# Altium PCB 板3.PcbDoc (part 2 of 3)
Units mm, origin at the board's own origin, x right, y up, seen from the top; angles counter-clockwise.
Board outline 152.4 x 101.6 mm, 4 copper layers (Top Layer, VCC, GND, Bottom Layer); 152 components, 486 nets, 1233 pads, 480 vias.
Unrouted connection lines stored in the file: 1.
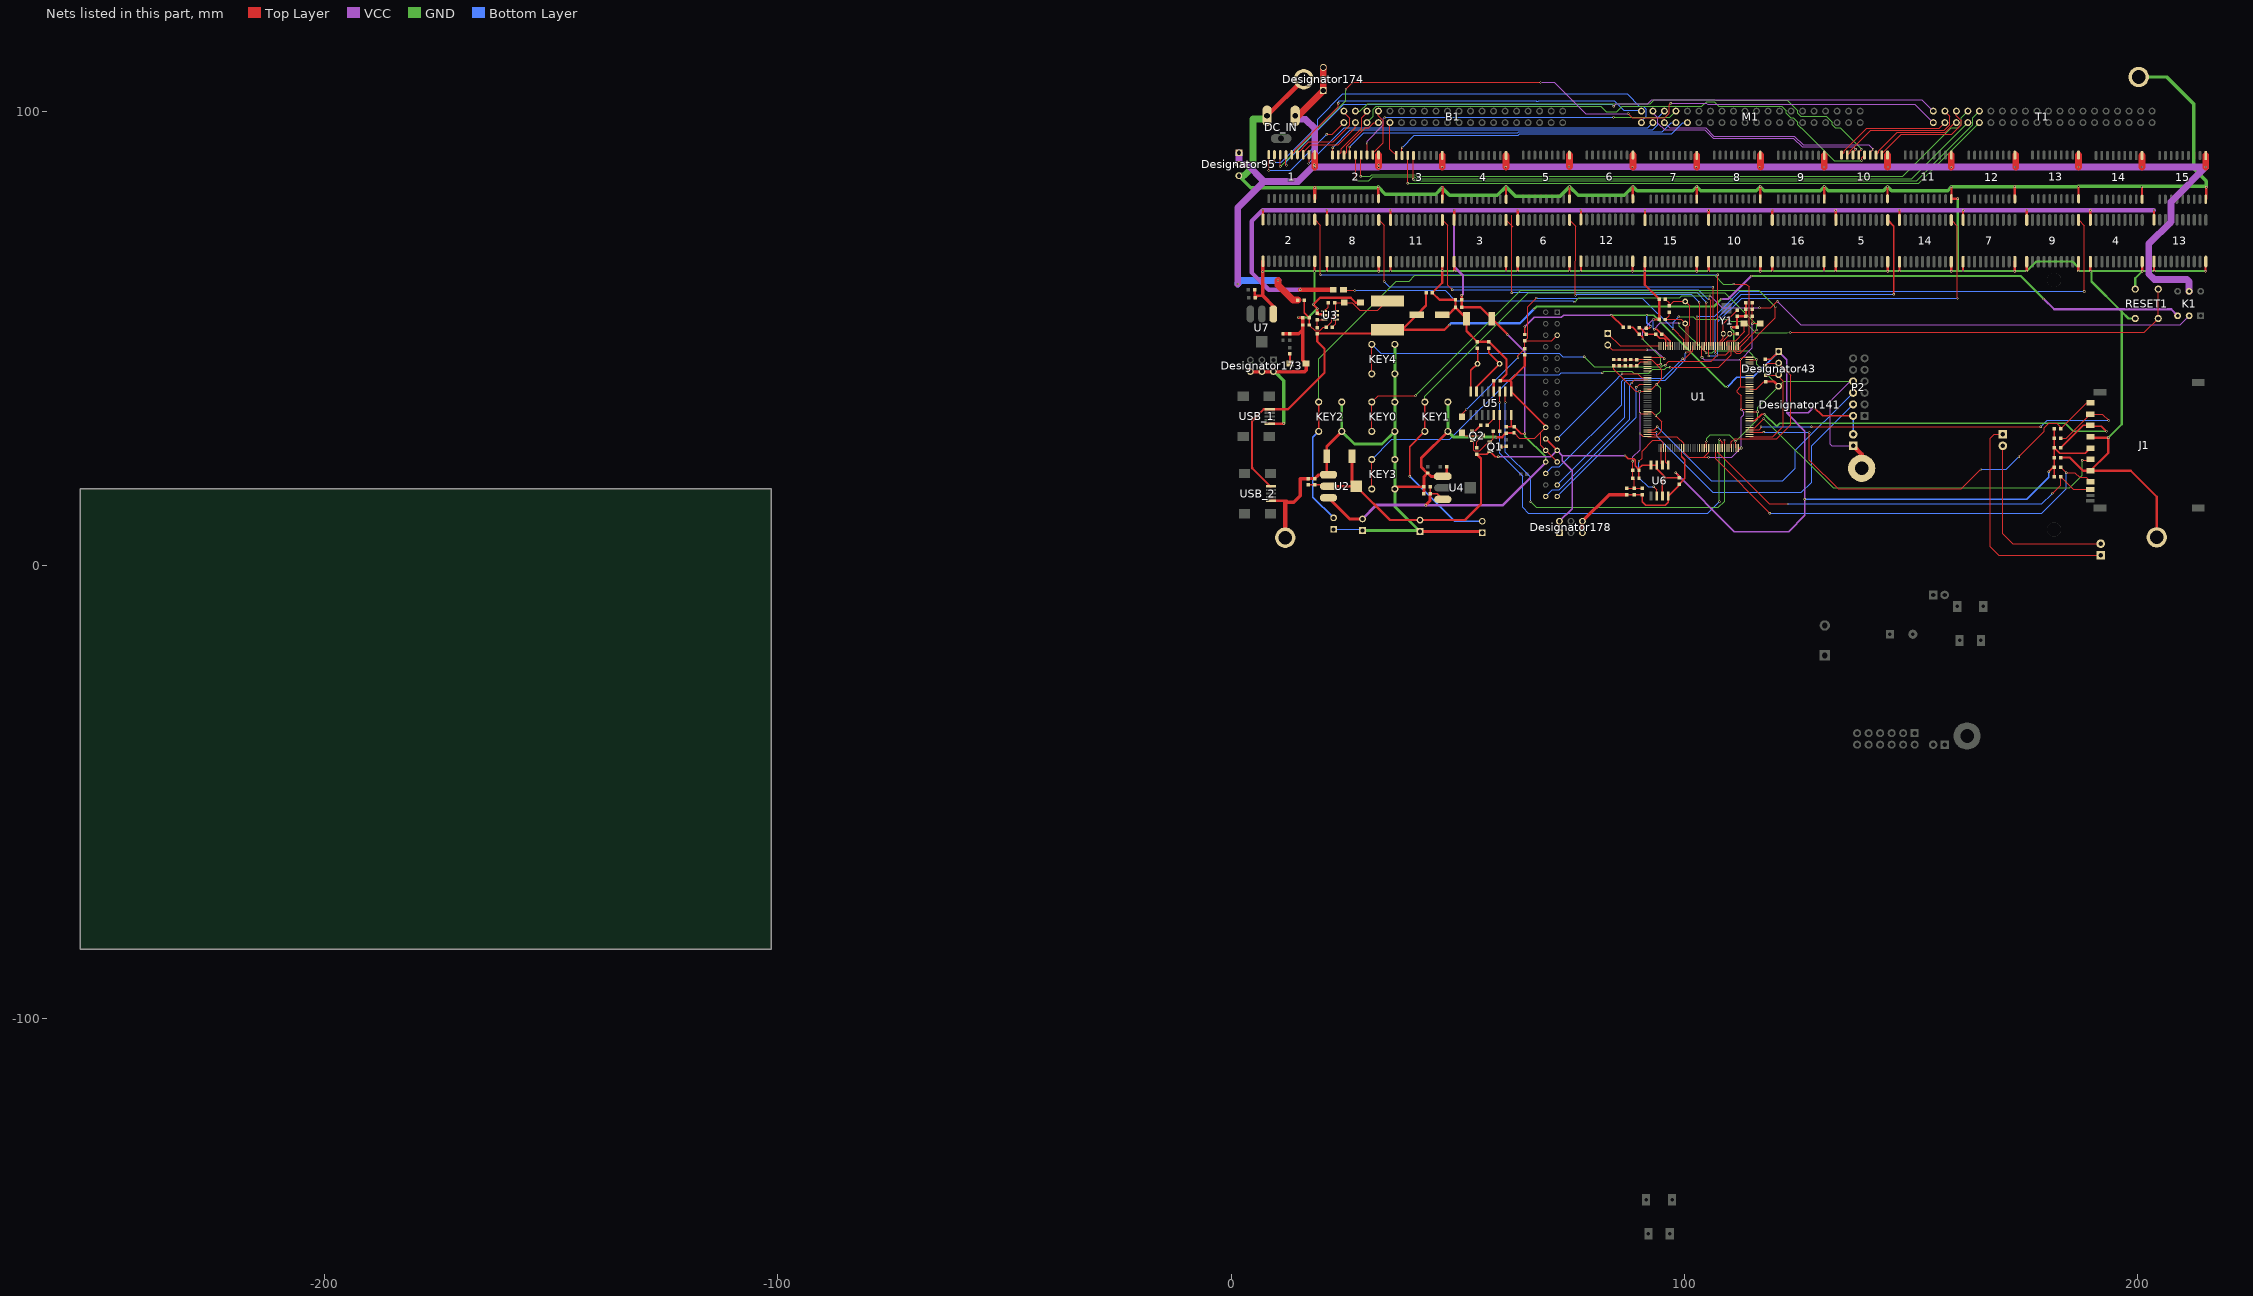
[diagram p4: the nets of this part, all layers, seen from the top]

## Via types
v1: diameter 0.5, hole 0.3, Top Layer to Bottom Layer, 465 vias
v2: diameter 3, hole 3, Top Layer to Bottom Layer, tented both sides, 6 vias
v3: diameter 1.27, hole 1.016, Top Layer to Bottom Layer, 4 vias
v4: diameter 1, hole 1, Top Layer to Bottom Layer, 4 vias
v5: diameter 0.8, hole 0.5, Top Layer to Bottom Layer, 1 vias

## Nets (pads, with @x,y where several pads share a name; then routed paths per layer and width w, separated by ;. In a path a pad name is that pad's centre, name@x,y a point inside that pad or via, vN(x,y) a via of type N, cw(c..) or ccw(c..) an arc to the next point about the centre after c; other vN are vias at no path point) (continued)
GND: 1.9 2.1@7.01,67.003 2.9@32.512,80.797 2.10@18.44,67.003 3.1@49.174,66.901 3.9@46.558,80.696 3.10@60.604,66.901 4.1@189.491,66.901 4.9@60.63,80.67 4.10@200.921,66.901 5.1@133.364,66.901 5.9@74.6,80.747 5.10@144.794,66.901 6.1@63.206,66.901 6.9@88.595,80.772 6.10@74.636,66.901 7.1@161.427,66.901 7.9@102.692,80.696 7.10@172.857,66.901 8.1@21.11,66.901 8.9@116.713,80.747 8.10@32.54,66.901 9.1@175.459,66.901 9.9@130.81,80.721 9.10@186.889,66.901 10.1@105.301,66.901 10.9@144.755,80.772 10.10@116.731,66.901 11.1@35.142,66.901 11.9@158.826,80.772 11.10@46.572,66.901 12.1@77.14,67.003 12.9@172.847,80.747 12.10@88.57,67.003 13.1@203.53,66.926 13.9@186.893,80.772 13.10@214.96,66.926 14.1@147.396,66.901 14.9@200.889,80.67 14.10@158.826,66.901 15.1@91.269,66.901 15.9@214.935,80.67 15.10@102.699,66.901 16.1 16.10 C2.1 C3.1 C4.1 C6.1 C7.1 C8.1 C9.1 C10.1 C11.2 C12.2 C13.2 C14.2 C15.2 C16.2 C17.2 C18.2 C19.2 C20.2 C21.2 C26.1 C27.1 C28.2 C29.1 C30.1 C31.1 C32.2 C34.1 C35.1 C36.1 C37.1 C38.1 C39.1 C40.1 C41.2 C42.1 C43.2 C44.1 C45.1 C47.2 C48.2 C49.2 C50.2 D3.1 D4.2 D5.1 D6.1 DC_IN.2 Designator43.4 Designator95.3 Designator137.1 Designator138.1 Designator141.22 Designator141.26 Designator141.27 Designator173.2 Designator173.4 Designator173.6 Designator178.5 Designator178.6 Designator179.1 Designator180.1 J1.3 J1.6 KEY0.1 KEY1.1 KEY2.1 KEY3.1 KEY4.1 P2.10 P3_1.1 pad.0@139.065,21.336 pad.1 pad.69 pad.72 R12.1 R14.2 RESET1.2 U1.16 U1.30 U1.31 U1.38 U1.51 U1.61 U1.71 U1.83 U1.94 U1.107 U1.120 U1.130 U1.143 U2.1 U3.2 U4.1 U5.1 U6.4 U7.1 USB_1.5 USB_2.5 | length 1313.4
  Top Layer w0.2: C43.2@62.381,29.121 63.562,27.94 66.946,27.94 Designator141.22@69.361,30.355 ; Designator141.22@69.367,30.353 68.28,29.266 68.28,26.36 69.363,25.277 Designator141.27@71.907,22.733 ; C18.2@84.33,45.326 84.355,45.301 C21.2@86.895,45.301 C20.2@89.41,45.301 ; C20.2@89.41,45.352 U1.38@91.783,45.352 ; U1.71@91.823,28.812 93.22,28.812 93.27,28.762 94.106,28.762 94.936,29.592 94.936,31.649 92.774,33.812 U1.61@91.823,33.812 ; U1.51@91.823,38.812 92.774,38.812 v1(93.844,39.882) 94.996,41.033 94.996,43.09 92.772,45.313 U1.38@91.823,45.313 ; 93.844,44.242 v1@94.686,44.242 ; U1.31@96.823,48.312 U1.30@97.323,48.312
  Top Layer w0.254: U1.83@99.323,25.812 99.323,23.917 99.346,23.894 ; U1.16@104.323,48.312 104.323,47.214 v1(104.724,46.812) ; U1.94@104.823,25.812 v1(104.823,27.229) ; v1(111.252,27.305) 111.323,27.234 U1.107@111.323,25.812 ; U1.120@114.323,33.812 pad.69@116.074,33.812 ; U1.130@114.323,38.812 115.774,38.812 117.424,40.462 R12.1@117.856,40.462 ; U1.143@114.323,45.312 v1@115.924,45.312
  Top Layer w0.3: C16.2@87.247,15.532 C15.2@88.898,15.532 C17.2@90.676,15.532 90.676,13.972 91.44,13.208 95.758,13.208 96.395,13.845 U6.4@96.395,15.189 98.804,17.599 C41.2@98.804,17.843 100.076,19.115 100.076,23.164 99.346,23.894 ; C44.1@87.808,52.4 88.544,52.4 C10.1@90.043,50.902 90.729,50.216 v1(90.729,49.835) ; v1(93.294,52.019) 93.853,52.019 C9.1@94.996,50.876 95.322,50.876 96.8,49.398 U1.31@96.8,48.335
  Top Layer w0.5: USB_1.5@8.528,31.166 11.524,31.166 v1(11.6,31.242) ; USB_2.5@8.782,14.148 12.268,14.148 ; v1@14.859,54.508 C31.1@15.799,54.508 ; v1(18.364,64.821) 2.10@18.364,66.926 ; v1(18.999,56.591) v1(18.11,57.48) 19.591,58.961 26.352,58.961 27.452,57.861 D3.1@28.499,57.861 ; v1@19.001,56.59 R14.2@19.001,55.512 19.184,55.328 20.328,55.328 U3.2@20.574,55.082 ; v1@21.11,64.849 8.1@21.11,66.901 ; v1(32.41,83.388) 32.41,81.001 2.9@32.563,80.848 ; v1(32.563,64.77) 8.10@32.563,66.878 ; v1@35.142,64.835 11.1@35.142,66.901 ; v1(46.507,83.185) 46.66,83.287 3.9@46.66,80.594 ; 11.10@46.558,66.887 v1(46.558,64.872) 46.558,62.255 C29.1@44.374,60.071 45.949,58.496 C2.1@49.479,58.496 C27.1@49.479,56.845 C27.1@49.479,56.769 ; C28.2@46.564,55.194 47.904,55.194 C27.1@49.479,56.769 ; U4.1@46.684,19.558 47.523,20.398 C35.1@47.523,21.667 ; v1(49.174,64.821) 3.1@49.174,66.901 ; v1(60.604,64.821) 3.10@60.604,66.901 ; 4.9@60.604,80.696 v1(60.604,83.464) ; C32.2@60.679,29.096 62.355,29.096 C43.2@62.381,29.121 ; v1(63.195,64.821) 63.206,64.831 6.1@63.206,66.901 ; C6.1@64.77,46.33 64.77,43.967 61.468,40.665 ; Designator141.26@69.03,25.277 Designator141.26@69.363,25.277 ; Designator141.22@69.367,30.353 69.367,30.616 U5.1@61.747,38.236 61.747,40.386 61.468,40.665 ; 5.9@74.6,80.747 v1@74.6,83.439 ; v1(74.625,64.821) 6.10@74.625,66.89 ; v1@77.14,64.846 12.1@77.14,67.003 ; v1(88.494,64.795) 12.10@88.494,66.926 ; 6.9@88.595,80.772 v1@88.595,83.439 ; 15.1@91.237,66.548 91.237,61.805 C8.1@94.393,58.649 C7.1@94.393,54.16 ; pad.72@93.142,54.153 C7.1@94.386,54.153 ; v1(102.692,64.795) 15.10@102.692,66.894 ; 7.9@102.692,80.696 v1(102.692,83.439) ; v1@105.301,64.838 10.1@105.301,66.901 ; v1(110.312,52.426) C3.1@111.582,52.426 C4.1@111.582,54.839 113.524,54.839 C14.2@113.524,57.836 ; 8.9@116.662,81.102 v1(116.662,83.439) ; v1(116.713,64.795) 10.10@116.713,66.883 ; R12.1@117.856,40.462 119.736,40.462 Designator43.4@120.752,39.446 ; v1@119.332,64.849 16.1@119.332,66.901 ; v1(130.734,64.821) 16.10@130.734,66.872 ; 9.9@130.81,80.721 v1(130.81,83.49) ; v1@133.364,64.86 5.1@133.364,66.901 ; 10.9@144.755,80.772 v1(144.755,83.439) ; v1(144.831,64.77) 5.10@144.831,66.864 ; v1@147.396,64.846 14.1@147.396,66.901 ; v1(158.801,64.795) 14.10@158.801,66.876 ; 11.9@158.826,80.772 v1@160.223,80.772 ; 11.9@158.852,80.797 v1(158.852,83.388) ; v1@161.427,64.857 7.1@161.427,66.901 ; v1(172.822,64.77) 7.10@172.822,66.865 ; 12.9@172.822,80.772 v1(172.822,83.439) ; v1@175.459,64.842 9.1@175.459,66.901 ; C42.1@182.931,23.693 184.944,23.693 187.846,20.791 J1.6@189.493,20.791 ; v1(186.842,64.821) 9.10@186.842,66.854 ; 13.9@186.868,80.797 v1(186.868,83.49) ; v1@189.491,64.827 4.1@189.491,66.901 ; J1.3@189.493,28.291 189.743,28.042 v1(193.421,28.042) 193.421,24.719 J1.6@189.493,20.791 ; 14.9@200.863,80.696 v1(200.863,83.388) ; v1(200.914,64.77) 4.10@200.914,66.894 ; 13.1@203.53,66.926 203.53,64.846 v1(203.556,64.821) ; pad.1@204.132,6.096 204.132,15.07 198.411,20.791 J1.6@189.493,20.791 ; v1(214.909,64.77) 13.10@214.909,66.876 ; 15.9@215.036,80.772 v1(215.036,83.337) ; C27.1@49.479,56.769 D5.1@51.892,54.356 51.892,51.613 C39.1@54.28,49.225 C38.1@56.845,49.225 56.858,49.225 60.706,45.377 60.706,42.062 C37.1@59.309,40.665 61.468,40.665
  Top Layer w0.508: v1(58.42,28.194) 59.777,28.194 ; 59.69,28.194 C32.2@60.592,29.096
  Top Layer w0.635: C49.2@5.187,60.704 5.187,59.01 C48.2@5.271,58.926 5.733,59.389 7.01,59.389 ; C45.1@17.043,19.051 C26.1@18.44,19.051 19.303,19.914 U2.1@21.461,19.914 21.082,20.293 D6.1@21.082,23.953 21.082,26.162 KEY2.1@24.384,29.464 ; KEY3.1@36.093,16.764 36.601,17.272 C40.1@42.494,17.272 ; Designator137.1@41.656,7.366 55.118,7.366 Designator180.1@55.372,7.112 ; C34.1@42.494,15.748 C40.1@42.494,17.272 ; U4.1@46.684,19.558 44.07,19.558 C36.1@43.332,20.295 ; KEY1.1@47.803,29.464 41.91,23.571 41.91,21.61 43.224,20.295 C36.1@43.332,20.295 ; C40.1@42.494,17.272 42.494,19.457 C36.1@43.332,20.295
  Top Layer w0.75: 11.934,13.814 13.814,13.814 15.24,15.24 15.24,19.05 ; 15.241,19.051 C45.1@17.043,19.051
  Top Layer w0.762: Designator173.6@4.234,42.672 Designator173.4@6.774,42.672 Designator173.2@9.314,42.672 16.256,42.672 16.51,42.926 D4.2@16.51,44.45 15.799,45.161 15.799,51.867 ; v1(6.934,64.694) 6.934,66.926 2.1@7.01,67.003 ; v1@7.01,64.618 7.01,59.389 9.313,57.086 U7.1@9.313,55.374 ; C50.2@11.432,50.99 C47.2@12.956,50.99 14.922,50.99 15.799,51.867 ; C31.1@15.799,54.508 C30.1@15.799,52.934 15.799,51.867 ; 1.9@18.44,80.823 v1@18.44,83.16 ; Designator178.5@77.47,7.112 Designator178.6@77.47,9.652 83.35,15.532 C16.2@87.247,15.532
  Top Layer w1: DC_IN.2@7.917,99.06 15.984,107.127 pad.1@15.998,107.127 ; pad.1@11.934,6.035 11.934,13.814 ; P3_1.1@137.16,26.289 139.065,24.384 pad.0@139.065,21.336
  VCC w0.254: v1(90.729,49.835) 90.729,51.74 pad.72@93.142,54.153 ; v1(93.294,52.019) 94.666,53.391 v1(98.831,53.391) ; P3_1.1@137.16,26.289 132.461,26.289 132.08,26.67 132.08,36.068 136.525,40.513 P2.10@137.16,40.513
  GND w0.254: v1@90.716,49.847 v1@90.729,49.86 ; v1(90.729,49.835) 94.717,45.847 v1(94.717,44.272) ; v1(93.675,32.893) 94.735,33.953 94.735,38.991 v1(93.844,39.882) ; v1(98.831,53.391) 98.831,52.705 v1(104.724,46.812) 106.143,46.812 106.568,47.237 110.82,47.237 114.002,47.237 v1(115.926,45.314) 115.926,44.272 Designator43.4@120.752,39.446 ; v1@104.696,27.229 104.902,27.435 104.902,27.94 105.664,28.702 109.855,28.702 v1(111.252,27.305) 116.103,32.156 pad.69@116.103,33.782 116.103,34.798 Designator43.4@120.752,39.446 ; P2.10@137.16,40.513 121.818,40.513 Designator43.4@120.752,39.446
  GND w0.3: v1(110.312,52.426) 110.312,52.014 110.815,51.511 110.815,47.242 110.82,47.237
  GND w0.5: v1@6.934,64.821 v1(18.364,64.821) ; v1(14.757,54.61) 17.018,54.61 v1(18.999,56.591) ; v1(18.11,57.48) 18.364,57.734 v1(18.364,64.821) ; KEY2.1@24.384,29.464 KEY2.1@24.384,35.964 ; v1@88.468,64.821 v1(77.114,64.821) v1(74.625,64.821) v1(63.195,64.821) v1(60.604,64.821) v1(49.174,64.821) v1(35.128,64.821) v1(21.082,64.821) v1(18.364,64.821) ; v1@88.494,64.821 v1(91.237,64.821) v1(105.283,64.821) v1(119.304,64.821) v1(130.734,64.821) v1(133.325,64.821) v1@144.78,64.821 ; v1@144.831,64.821 v1(147.371,64.821) v1(161.392,64.821) v1@172.771,64.821 ; 160.249,64.897 v1(160.249,80.797) ; v1@172.822,64.821 v1(175.438,64.821) 177.546,66.929 185.547,66.929 186.842,65.634 v1(186.842,64.821) v1(189.484,64.821) ; v1(193.421,28.042) 196.444,31.064 196.444,55.829 ; RESET1.2@199.39,54.356 197.917,54.356 196.444,55.829 ; RESET1.2@199.39,60.856 199.39,63.246 v1(200.914,64.77) ; v1@200.863,64.821 v1(189.484,64.821) ; v1@200.914,64.821 v1(203.556,64.821) v1@214.935,64.821 ; v1(189.484,64.821) 189.763,64.541 189.763,62.509 196.444,55.829
  GND w0.635: KEY2.1@24.384,29.464 27.178,26.67 33.299,26.67 KEY0.1@36.093,29.464 ; Designator138.1@28.956,7.62 Designator137.1@41.402,7.62 ; KEY4.1@36.093,48.664 KEY4.1@36.093,42.164 KEY0.1@36.093,35.964 KEY0.1@36.093,29.464 ; Designator137.1@41.656,7.366 Designator137.1@41.402,7.62 ; KEY1.1@47.803,35.964 KEY1.1@47.803,29.464 49.073,28.194 v1(58.42,28.194) ; KEY0.1@36.093,29.464 KEY3.1@36.093,23.264 KEY3.1@36.093,16.764 36.093,12.929 Designator137.1@41.402,7.62
  GND w0.762: Designator95.3@1.694,85.852 4.361,83.185 v1(18.415,83.185) 32.207,83.185 v1(32.41,83.388) 34.011,81.788 45.11,81.788 v1(46.507,83.185) 48.158,81.534 58.696,81.534 60.604,83.442 62.767,81.28 72.463,81.28 74.625,83.442 76.533,81.534 86.712,81.534 88.621,83.442 89.513,82.55 101.803,82.55 v1(102.692,83.439) 103.581,82.55 115.773,82.55 v1(116.662,83.439) 117.551,82.55 129.918,82.55 130.81,83.442 131.702,82.55 143.866,82.55 v1(144.755,83.439) 145.644,82.55 158.013,82.55 v1(158.852,83.388) 158.902,83.439 v1(172.822,83.439) 186.817,83.439 v1(186.868,83.49) 214.884,83.49 v1(215.036,83.337) 215.036,84.684 212.344,87.376 212.344,101.6 206.309,107.635 pad.1@200.148,107.635 ; v1@6.934,64.676 v1(6.934,64.694) ; DC_IN.2@7.219,98.362 DC_IN.2@7.917,99.06 ; Designator173.2@9.314,42.672 9.568,42.672 11.6,40.64 v1(11.6,31.242)
  GND w1.5: Designator95.3@1.694,85.852 2.794,85.852 4.806,87.864 4.806,98.362 DC_IN.2@7.219,98.362
  Bottom Layer w0.2: Designator179.1@22.606,7.874 28.702,7.874 Designator138.1@28.956,7.62
  Bottom Layer w0.254: pad.72@93.142,54.153 93.142,52.172 v1(93.294,52.019)
  other v1: 74.625,83.464 88.621,83.464
IOVDD: 
"IWIRE DQ": 
"JOY CLK": J1.5 U1.113 | length 86.9
  Top Layer w0.254: U1.113@114.323,30.312 115.478,30.312 v1@117.462,32.296 ; v1(187.706,23.114) 189.316,23.114 J1.5@189.493,23.291
  GND w0.254: v1(117.45,32.309) 132.74,17.018 184.912,17.018 187.706,19.812 v1(187.706,23.114)
"JOY DAT": J1.8 R28.1 U1.99 | length 92.6
  Top Layer w0.254: U1.99@107.323,25.812 107.323,24.822 118.683,13.462 v1(122.682,13.462) ; v1(181.102,15.748) 182.931,17.577 R28.1@182.931,19.456 185.725,16.662 J1.8@189.484,16.662
  Bottom Layer w0.254: v1(122.682,13.462) 178.816,13.462 v1(181.102,15.748)
"JOY LAT": J1.7 R27.1 U1.98 | length 98.4
  Top Layer w0.2: U1.98@106.823,25.812 106.823,23.384 v1(118.777,11.43) ; R27.1@182.931,21.575 v1(184.186,20.32) 186.098,20.32 187.114,19.304 188.555,19.304 J1.7@189.493,18.366
  Bottom Layer w0.2: v1(118.777,11.43) 178.816,11.43 184.186,16.8 v1(184.186,20.32)
JRDO: 
JTCK: Designator43.3 R12.2 U1.109 | length 23.2
  Top Layer w0.2: U1.109@114.323,28.312 119.498,28.312 121.802,30.616 121.802,40.496 120.752,41.546 Designator43.3@120.752,41.986 120.612,41.847 R12.2@117.858,41.847
JTDI: U1.110
JTMS: Designator43.2 R6.2 U1.105 | length 33.9
  Top Layer w0.2: U1.105@110.323,25.812 110.323,27.154 111.054,27.885 120.341,27.885 123.444,30.988 123.444,41.834 Designator43.2@120.752,44.526 118.324,44.526 R6.2@117.778,43.98
KEY0: KEY0.2 U1.3 | length 123.4
  Top Layer w0.2: 112.269,46.712 120.04,54.483 v1(120.04,56.921)
  Top Layer w0.254: KEY0.2@31.013,29.464 KEY0.2@31.013,35.964 32.387,37.338 v1(40.64,37.338) ; U1.3@110.823,48.312 110.823,47.256 111.395,46.685 112.251,46.685 112.274,46.707
  GND w0.254: v1(40.64,37.338) 63.881,60.579 116.383,60.579 v1(120.04,56.921)
KEY1: Designator180.2 KEY1.2 U1.2 | length 134.1
  Top Layer w0.2: U1.2@111.323,48.312 111.323,47.36 111.572,47.112 112.074,47.112 112.25,47.287 112.25,48.166 v1(115.926,51.841)
  Top Layer w0.3: v1(39.37,19.558) 39.37,26.111 KEY1.2@42.723,29.464 KEY1.2@42.723,35.964
  GND w0.254: KEY1.2@42.723,35.964 42.723,37.236 65.557,60.071 108.89,60.071 115.926,53.035 v1(115.926,51.841)
  Bottom Layer w0.3: v1(39.37,19.558) 49.276,9.652 Designator180.2@55.372,9.652
KEY2: Designator179.2 KEY2.2 U1.1 | length 155.1
  Top Layer w0.2: U1.1@111.823,48.312 111.823,48.602 114.229,51.008 114.229,61.392
  Top Layer w0.254: v1(110.842,61.976) 113.644,61.976 114.229,61.392
  Top Layer w0.3: KEY2.2@19.304,29.464 KEY2.2@19.304,35.964
  GND w0.254: KEY2.2@19.304,35.964 19.304,45.466 36.449,62.611 39.243,62.611 40.506,63.874 106.659,63.874 108.556,61.976 v1(110.842,61.976)
  Bottom Layer w0.3: KEY2.2@19.304,29.464 18.034,28.194 18.034,14.986 Designator179.2@22.606,10.414
KEY3: KEY3.2 U1.4 | length 97.7
  Top Layer w0.254: KEY3.2@31.013,16.764 KEY3.2@31.013,23.264 ; v1(96.799,43.637) 107.544,43.637 110.323,46.416 U1.4@110.323,48.312
  GND w0.254: v1(81.839,42.367) 82.213,42.741 88.32,42.741 88.788,42.273 92.13,42.273 93.03,43.173 95.627,43.173 96.091,43.637 v1(96.799,43.637)
  Bottom Layer w0.254: KEY3.2@31.013,23.264 35.435,27.686 48.254,27.686 62.506,41.939 72.369,41.939 72.798,42.367 v1(81.839,42.367)
KEY4: KEY4.2 U1.5 | length 90
  Top Layer w0.254: KEY4.2@31.013,42.164 KEY4.2@31.013,48.664 ; v1(95.707,44.069) 96.527,44.889 105.852,44.889 107.369,46.406 109.118,46.406 109.823,47.11 U1.5@109.823,48.312
  GND w0.254: v1(77.851,45.923) 80.079,43.695 94.956,43.695 95.329,44.069 v1(95.707,44.069)
  Bottom Layer w0.254: KEY4.2@31.013,48.664 32.97,46.707 72.369,46.707 73.153,45.923 v1(77.851,45.923)
l1: P4_1.1 P4_2.1 | length 52.2
  Top Layer w0.254: P4_1.1@170.18,28.829 168.275,28.829 167.386,27.94 167.386,4.064 169.291,2.159 P4_2.1@191.77,2.159
l2: P4_1.2 P4_2.2 | length 41.9
  Top Layer w0.254: P4_1.2@170.18,26.289 170.18,6.858 172.339,4.699 P4_2.2@191.77,4.699
"LCD BL": Designator141.23 U1.46 | length 26.2
  Top Layer w0.2: v1(86.208,42.164) 89.662,42.164 90.514,41.312 U1.46@91.823,41.312
  Bottom Layer w0.2: Designator141.23@71.907,27.813 85.42,41.326 85.42,41.377 v1(86.208,42.164)
LED0: U1.135
LED1: 
LRCK: 
MCLK: 
"MP3 LEFT": 
"MP3 RIGHT": 
NetANT1_1: 
NetBAT_1: 
NetBEEP1_2: 
NetBOOT1_3: 
NetBOOT1_4: 
NetC3_2: C3.2 U1.8 Y1.2 | length 5
  Top Layer w0.2: U1.8@108.323,48.312 108.323,49.263 109.957,50.897 Y1.2@109.957,51.029 C3.2@111.568,51.029
NetC4_2: C4.2 U1.9 Y1.1 | length 9.5
  Top Layer w0.2: U1.9@107.823,48.312 107.823,49.329 108.534,50.04 Y1.1@108.534,51.029 108.534,53.173 C4.2@111.584,56.223
NetC7_2: C7.2 R2.1 U1.24 Y2.1 | length 11.8
  Top Layer w0.2: R2.1@96.622,55.778 96.622,55.002 C7.2@95.771,54.151 99.265,54.151 Y2.1@100.152,53.264 100.323,53.093 U1.24@100.323,48.312
NetC8_2: C8.2 R2.2 U1.23 Y2.2 | length 16.1
  Top Layer w0.2: C8.2@95.777,58.647 96.623,57.801 R2.2@96.623,57.163 97.604,58.144 Y2.2@100.152,58.144 101.087,57.209 101.087,52.877 100.823,52.612 U1.23@100.823,48.312
NetC22_1: C22.1 U3.1 | length 2.2
  Top Layer w0.2: U3.1@20.574,56.032 21.412,56.871 C22.1@21.412,57.887
NetC22_2: C22.2 D3.2 L1.2 U3.6 | length 15.3
  Top Layer w0.2: U3.6@23.114,56.032 23.114,57.567 C22.2@22.796,57.885 26.651,57.885 28.402,56.134 32.36,56.134 L1.2@34.468,58.242
NetC30_2: C30.2 C31.2 R15.1 R23.1 U3.5 | length 14.3
  Top Layer w0.2: C30.2@17.183,52.932 17.245,52.932 18.496,51.681 19.506,51.681 20.276,52.451 R15.1@20.955,52.451 22.179,53.675 22.179,54.511 22.355,54.686 22.718,54.686 U3.5@23.114,55.082
  Top Layer w0.3: C30.2@17.183,52.932 C31.2@17.183,54.507
  Top Layer w0.305: R23.1@16.096,58.42 16.096,55.594 C31.2@17.183,54.507
NetC37_2: C37.2 U5.4 | length 2.4
  Top Layer w0.5: U5.4@57.937,38.236 C37.2@57.937,40.654
NetC38_2: C38.2 U5.7 Y3.1 | length 12.7
  Top Layer w0.3: U5.7@54.127,38.236 54.127,39.319 Y3.1@59.207,44.399 56.844,46.763 C38.2@56.844,47.841
NetC39_2: C39.2 U5.8 Y3.2 | length 10.3
  Top Layer w0.3: U5.8@52.857,38.236 52.857,42.929 Y3.2@54.327,44.399 C39.2@54.327,47.966
NetC46_1: 
NetC49_1: 
NetC49_2: 
NetC50_1: 
NetC50_2: 
NetC55_2: 
NetC57_1: 
NetC58_1: 
NetC66_2: 
NetC67_2: 
NetC68_2: 
NetC69_2: 
NetC70_1: 
NetC70_2: 
NetC74_2: 
NetC75_2: 
NetC76_2: 
NetC77_1: 
NetC77_2: 
NetC78_1: 
NetC78_2: 
NetC79_1: 
NetC80_1: 
NetC81_1: 
NetC82_1: 
NetC91_2: 
NetCAN1_1: 
NetCAN1_3: 
NetD1_2: D1.2 U1.6 | length 7.6
  Top Layer w0.2: U1.6@109.323,48.312 109.323,49.263 109.572,49.512 111.237,49.512 113.182,51.457 113.132,51.508 D1.2@113.132,53.289
NetD4_1: 1.10 2.10@32.512,90.449 3.10@46.558,90.348 4.10@60.63,90.322 5.10@74.6,90.399 6.10@88.595,90.424 7.10@102.692,90.348 8.10@116.713,90.399 9.10@130.81,90.373 10.10@144.755,90.424 11.10@158.826,90.424 12.10@172.847,90.399 13.10@186.893,90.424 14.10@200.889,90.322 15.10@214.935,90.322 DC_IN.1 Designator95.1 Designator95.2 Designator174.1 Designator174.2 Designator174.3 K1.5 R23.2 | length 366.1
  Top Layer w1.5: v1(10.33,62.738) 10.33,61.722 13.631,58.422 R23.2@14.712,58.422 ; DC_IN.1@14.117,99.06 14.732,99.06 Designator174.1@20.32,104.648 Designator174.2@20.32,107.188 Designator174.3@20.32,109.728 ; v1(18.44,87.757) 1.10@18.44,90.475 ; v1@32.512,87.884 2.10@32.512,90.449 ; v1@46.558,87.757 3.10@46.558,90.348 ; v1@60.63,87.757 4.10@60.63,90.322 ; v1@74.6,87.859 5.10@74.6,90.399 ; v1@88.595,87.757 6.10@88.595,90.424 ; v1@102.692,87.757 7.10@102.692,90.348 ; v1@116.713,87.757 8.10@116.713,90.399 ; v1@130.81,87.782 9.10@130.81,90.373 ; v1@144.755,87.782 10.10@144.755,90.424 ; v1@158.826,87.732 11.10@158.826,90.424 ; v1@173.025,87.782 12.10@173.025,90.399 ; v1@186.893,87.782 13.10@186.893,90.424 ; v1@200.889,87.782 14.10@200.889,90.322 ; v1(214.935,87.782) 15.10@214.935,90.322
  VCC w1.5: v1(1.44,61.976) 1.44,78.74 7.282,84.582 ; Designator95.1@1.694,90.932 Designator95.2@1.694,88.392 3.472,88.392 7.282,84.582 ; DC_IN.1@14.625,98.298 16.426,98.298 18.44,96.284 v1(18.44,87.757) ; v1@32.48,87.757 v1(18.44,87.757) ; v1@32.563,87.839 88.411,87.839 v1(88.494,87.757) 144.602,87.757 144.628,87.782 v1(144.856,87.782) v1(172.898,87.782) v1(186.868,87.782) v1(200.863,87.782) v1(214.935,87.782) 207.264,80.112 207.264,75.692 202.356,70.784 202.356,64.241 203.605,62.992 210.82,62.992 211.277,62.535 K1.5@211.277,60.366 ; 7.282,84.582 14.778,84.582 17.953,87.757 v1(18.44,87.757)
  Bottom Layer w1.5: v1(1.44,61.976) 2.202,62.738 v1(10.33,62.738)
  other v1: 32.563,87.681 158.852,87.732 46.533,87.757 60.579,87.757 102.591,87.757 116.548,87.757 130.759,87.782 74.498,87.859 18.313,88.265 32.512,88.29
NetD7_2: D7.2 Q2.3 R20.2 | length 8
  Top Layer w0.2: D7.2@50.927,29.159 51.562,28.524 Q2.3@55.455,28.524 54.129,27.198 R20.2@54.129,25.845
NetDS1_1: 
NetDS2_1: 
NetEJ_2: 
NetEJ_4: 
NetF1_2: F1.2 K1.2 | length 193.1
  Top Layer w0.2: F1.2@24.435,60.554 v1(27.229,60.554)
  Top Layer w0.254: v1(116.51,56.718) 119.024,56.718 119.463,57.157 119.463,57.16 119.801,57.498 119.805,57.498 v1(120.472,58.166)
  VCC w0.254: v1(105.613,59.411) 108.306,56.718 v1(116.51,56.718) ; v1(120.472,58.166) 125.628,53.01 209.321,53.01 K1.2@211.277,54.966
  GND w0.254: v1(75.743,57.988) 76.657,58.903 98.882,58.903 99.39,59.411 v1(105.613,59.411)
  Bottom Layer w0.2: v1(27.229,60.554) 47.177,60.554 49.404,58.327 75.378,58.327 v1@75.717,57.988 ; v1@75.73,57.975 v1@75.743,57.963
NetLED2: 
NetP5_5: 
NetP5_6: 
NetQ1_2: Q1.2 Q2.1 R18.2 | length 9.6
  Top Layer w0.2: Q2.1@53.105,27.574 53.448,27.231 53.448,25.339 53.624,25.164 54.81,25.164 56.682,27.036 Q1.2@57.016,27.036 57.823,27.843 R18.2@57.823,29.516
NetQ1_3: Q1.3 R17.1 | length 1.4
  Top Layer w0.2: Q1.3@59.366,26.086 60.554,26.086 R17.1@60.706,26.238
NetQ2_2: Q2.2 R19.2 | length 2.5
  Top Layer w0.3: Q2.2@53.105,29.474 53.768,29.474 R19.2@55.08,30.786
NetQ3_2: 
NetR1_2_1: 
NetR4_1: 
NetR4_1_1: 
NetR14_1: R14.1 R16.2 U3.3 | length 3.3
  Top Layer w0.2: R16.2@18.999,52.364 R14.1@18.999,54.127 U3.3@20.569,54.127
NetR15_2: R15.2 U3.4 | length 2
  Top Layer w0.2: R15.2@22.339,52.449 23.114,53.224 U3.4@23.114,54.132
NetR18_1: R18.1 U5.14 | length 3.5
  Top Layer w0.254: R18.1@59.207,29.515 U5.14@59.207,33.036
NetR19_1: R19.1 U5.13 | length 2.9
  Top Layer w0.2: R19.1@56.464,30.785 57.937,32.258 U5.13@57.937,33.036
NetR26_1: 
NetR30_1: 
NetR31_1: 
NetR37_1: 
NetR42_1: 
NetR47_2: 
NetR55_1: 
NetR58_1: 
NetU11_11: 
"NRF CE": U1.91
"NRF CS": U1.92
"NRF IRQ": U1.93
OUTL: 
OUTR: 
"OV SCL": U1.117
"OV SDA": 
"OV VSYNC": U1.100
PA0: U1.34
PA1: U1.35
PA2: Designator135.1 U1.36 | length 12.4
  Top Layer w0.254: Designator135.1@83.058,51.054 85.8,48.312 U1.36@94.323,48.312
PA3: Designator135.2 U1.37 | length 17.5
  Top Layer w0.254: Designator135.2@83.058,48.514 84.074,47.498 v1(91.694,47.498) ; U1.37@91.823,45.812 95.158,45.812 v1(95.504,45.466)
  VCC w0.254: v1(91.694,47.498) 93.472,47.498 v1(95.504,45.466)
PA4: U1.40
PA5: U1.41
PA6: U1.42
PA7: U1.43
PA9: U1.101 U5.3 | length 88.5
  Top Layer w0.2: v1(59.207,35.839) U5.3@59.207,38.236 ; v1(107.696,27.686) 108.323,27.059 U1.101@108.323,25.812
  GND w0.254: v1(107.696,13.97) v1(107.696,27.686)
  Bottom Layer w0.2: v1(59.207,35.839) 59.207,24.613 64.262,19.558 64.262,12.7 65.532,11.43 105.156,11.43 v1(107.696,13.97)
PA10: U1.102 U5.2 | length 85.7
  Top Layer w0.2: v1(60.477,35.839) U5.2@60.477,38.236 ; U1.102@108.823,25.812 v1(108.823,27.575)
  GND w0.254: v1(66.04,13.97) 67.31,12.7 107.442,12.7 108.823,14.081 v1(108.823,27.575)
  Bottom Layer w0.2: v1(60.477,35.839) 60.477,24.867 66.04,19.304 v1(66.04,13.97)
PA11: U1.103
PA12: U1.104
PB1: Designator141.34 U1.47 | length 37.5
  Top Layer w0.2: v1(88.367,40.157) 89.021,40.812 U1.47@91.823,40.812
  Bottom Layer w0.2: Designator141.34@69.367,15.113 70.82,16.566 72.358,16.566 87.909,32.117 87.909,39.7 v1(88.367,40.157)
PB6: U1.136
PB9: U1.140
PB10: P2.9 U1.69 | length 60.9
  Top Layer w0.254: U1.69@91.823,29.812 93.312,29.812 v1(93.98,30.48)
  Bottom Layer w0.254: v1(93.98,30.48) 105.918,18.542 121.666,18.542 124.46,21.336 124.46,25.273 P2.9@137.16,37.973
PB11: P2.8 U1.70 | length 64.2
  Top Layer w0.254: U1.70@91.823,29.312 v1(93.828,29.312)
  Bottom Layer w0.254: v1(93.828,29.312) 93.828,28.346 106.172,16.002 125.73,16.002 128.016,18.288 128.016,26.289 P2.8@137.16,35.433
PB13: U1.74 U6.6 | length 3.9
  Top Layer w0.2: U1.74@94.823,25.812 94.823,22.347 U6.6@95.123,22.047
PB14: U1.75 U6.2 | length 19.6
  Top Layer w0.2: v1(89.936,22.86) 90.656,23.581 90.656,25.124 93.017,27.485 94.742,27.485 95.25,26.977 95.25,25.885 U1.75@95.323,25.812 ; v1(93.218,17.272) 93.855,16.635 U6.2@93.855,15.189
  Bottom Layer w0.2: v1(89.936,22.86) 89.936,19.284 91.948,17.272 v1(93.218,17.272)
PB15: U1.76 U6.5 | length 4
  Top Layer w0.2: U1.76@95.823,25.812 95.823,22.617 U6.5@96.393,22.047
PC10: J1.9 R22.1 U1.111 | length 93.5
  Top Layer w0.2: U1.111@114.323,29.312 v1(117.45,29.312) ; v1(127.508,29.21) 127.508,23.114 133.858,16.764 161.036,16.764 v1(165.354,21.082) ; v1(173.736,23.876) 179.324,29.464 179.324,30.226 180.34,31.242 182.118,31.242 182.931,30.429 R22.1@182.931,30.048 188.674,35.791 J1.9@189.493,35.791
  Bottom Layer w0.2: v1(117.45,29.312) 127.406,29.312 v1(127.508,29.21) ; v1(165.354,21.082) 170.942,21.082 v1(173.736,23.876)
PC11: J1.1 R24.1 U1.112 | length 93.6
  Top Layer w0.254: U1.112@114.323,29.812 116.492,29.812 116.84,30.159 v1(116.84,30.48) ; v1(128.016,30.48) v1(178.562,30.48) ; R24.1@182.931,27.93 184.14,27.93 J1.1@189.484,33.274 192.126,33.274 v1(193.523,31.877)
  Bottom Layer w0.254: v1(116.84,30.48) v1(128.016,30.48) ; v1(178.562,30.48) 179.959,31.877 v1(193.523,31.877)
PC13: U1.7
PD2: J1.2 R25.1 U1.116 | length 94.2
  Top Layer w0.3: U1.116@114.323,31.812 115.505,31.812 116.967,33.274 v1(117.602,33.274) ; R25.1@182.931,25.811 187.904,30.785 J1.2@189.484,30.785 189.687,30.582 191.948,30.582 v1(193.04,29.489)
  GND w0.3: v1(117.602,33.274) 120.32,30.556 121.006,31.242 183.972,31.242 185.725,29.489 v1(193.04,29.489)
PD6: U1.122
PD7: U1.123
PE0: U1.141
PE1: U1.142
PE6: 
PF0: 2.11@18.44,76.203 U1.10 | length 116
  Top Layer w0.2: 2.11@18.44,76.203 19.685,74.958 v1(19.685,64.008) ; U1.10@107.34,48.329 v1(107.34,64.008)
  Bottom Layer w0.2: v1(19.685,64.008) v1(107.34,64.008)
PF1: 5.11@144.794,76.101 U1.11 | length 67.6
  Top Layer w0.2: v1@106.823,46.676 U1.11@106.823,48.312
  Top Layer w0.3: v1(106.807,46.66) v1@106.823,46.676 ; 5.11@144.794,76.101 146.152,74.743 v1@146.152,59.792
  Bottom Layer w0.2: v1(106.807,46.66) 106.807,54 112.497,59.69 v1(146.152,59.69)
PF2: 8.11@32.54,76.101 U1.12 | length 100.1
  Top Layer w0.2: 8.11@32.54,76.101 33.747,74.895 v1(33.747,62.519) ; v1(106.248,61.265) 106.323,61.19 U1.12@106.323,48.312
  Bottom Layer w0.2: v1(33.747,62.519) 34.908,61.358 v1@106.35,61.358
PF3: 11.11@46.572,76.101 U1.13 | length 84.3
  Top Layer w0.2: 11.11@46.572,76.101 47.752,74.921 47.752,61.722 v1(48.768,60.706) ; v1(105.385,58.699) 105.823,58.261 U1.13@105.823,48.312
  Bottom Layer w0.2: v1@48.768,60.731 102.997,60.731 105.029,58.699 v1(105.385,58.699)
PF4: 14.11@158.826,76.101 U1.14 | length 84.5
  Top Layer w0.2: v1@105.323,46.112 U1.14@105.323,48.312 ; 14.11@158.826,76.101 160.172,74.754 v1(160.172,58.801)
  Bottom Layer w0.2: v1(105.334,46.101) 107.29,46.101 107.357,46.168 107.357,53.611 112.598,58.852 v1@160.122,58.852
PF5: 3.11@60.604,76.101 U1.15 | length 72.7
  Top Layer w0.2: 3.11@60.604,76.101 62.154,74.551 ; v1(61.874,60.071) 61.9,60.096 61.9,77.091 ; v1(104.8,57.912) 104.8,48.334 U1.15@104.823,48.312
  Bottom Layer w0.2: v1(61.874,60.071) 61.925,60.122 102.591,60.122 ; 102.641,60.122 104.826,57.937 v1(104.8,57.912)
PF6: 6.11@74.636,76.101 U1.18 | length 55.1
  Top Layer w0.2: 6.11@74.636,76.101 74.636,75.986 75.946,74.676 v1(75.921,59.436) ; v1@103.302,57.963 103.302,48.333 U1.18@103.323,48.312
  Bottom Layer w0.2: v1(75.921,59.436) 76.175,59.69 101.49,59.69 v1@103.294,57.886
  other v1: 103.2,57.963
PF7: 9.11@186.889,76.101 pad.71 U1.19 | length 110.6
  Top Layer w0.2: v1@102.692,54.864 v1(102.75,54.806) 102.75,48.385 U1.19@102.823,48.312 ; 9.11@186.889,76.101 188.163,74.827 pad.71@188.163,60.342
  Bottom Layer w0.2: v1@102.743,54.813 106.655,54.813 112.183,60.342 pad.71@188.163,60.342
PF8: U1.20
PF9: Designator141.30 U1.21 | length 47.8
  Top Layer w0.2: v1(99.619,45.466) 100.071,45.466 101.823,47.218 U1.21@101.823,48.312
  Bottom Layer w0.2: Designator141.30@69.367,20.193 70.82,21.646 72.358,21.646 86.106,35.394 86.106,40.513 86.754,41.161 88.782,41.161 88.796,41.148 95.301,41.148 v1(99.619,45.466)
PF10: Designator141.31 U1.22 | length 48.2
  Top Layer w0.254: v1(100.33,46.888) 100.526,47.085 101.085,47.085 101.323,47.322 U1.22@101.323,48.312
  Bottom Layer w0.254: Designator141.31@71.907,17.653 86.843,32.588 86.843,40.361 87.216,40.734 88.606,40.734 88.619,40.721 95.69,40.721 100.196,45.227 100.196,46.754 v1(100.33,46.888)
PF11: Designator141.33 U1.49 | length 34
  Top Layer w0.2: v1(89.357,39.218) 89.392,39.218 90.069,39.895 90.525,39.895 90.608,39.812 U1.49@91.823,39.812
  Bottom Layer w0.2: Designator141.33@71.907,15.113 89.332,32.537 v1@89.332,39.116
PG6: 
PG9: U1.124
PG10: U1.125
PG11: U1.126
PG13: U1.128
PG14: U1.129
PG15: U1.132
"PWM AUDIO": 
"RADIO L": 
"RADIO R": 
RESET: C6.2 D7.1 Designator141.5 R1.1 RESET1.1 U1.25 | length 196.7
  Top Layer w0.2: D7.1@50.927,32.715 50.927,33.401 v1(51.816,34.29) ; v1(63.246,45.72) 63.246,46.188 C6.2@64.772,47.714 64.719,47.766 R1.1@64.719,49.454 ; v1(67.31,58.877) 65.402,56.969 65.402,50.157 64.719,49.474 R1.1@64.719,49.454 ; Designator141.5@71.907,50.673 70.688,49.454 R1.1@64.719,49.454 ; v1(97.46,52.095) 99.823,49.732 U1.25@99.823,48.312
  Top Layer w0.254: v1(123.317,51.283) 201.397,51.283 RESET1.1@204.47,54.356 RESET1.1@204.47,60.856
  GND w0.254: v1(98.704,54.788) 101.952,54.788 102.511,54.229 109.702,54.229 110.185,53.746 113.205,53.746 115.687,51.264 122.537,51.264 v1(123.317,51.283) ; 122.555,51.264 122.599,51.264
  Bottom Layer w0.2: v1(51.816,34.29) v1(63.246,45.72) ; v1(67.31,58.877) 90.678,58.877 v1(97.46,52.095) 97.46,53.543 v1(98.704,54.788)
RST: 
RXD: 
SCLK: 
SDIN: 
SS1: D4.1 R21.2 | length 2.1
  Top Layer w0.3: D4.1@12.952,44.452 D4.1@12.954,44.45
  Top Layer w0.5: D4.1@12.952,44.452 R21.2@12.952,46.545
TPAD: 
TXD: 
VCC3.3: C26.2 C41.1 C42.2 C44.2 C45.2 D6.2 Designator43.1 Designator137.2 Designator141.24 Designator141.25 Designator178.1 Designator178.2 J1.4 P2.7 P3_1.2 Q1.1 R1.2 R3.2 R6.1 R10.1 R11.1 R20.1 R22.2 R24.2 R25.2 R27.2 R28.2 U2.2 U2.4 U6.3 U6.7 U6.8 | length 394.2
  Top Layer w0.3: C45.2@17.042,17.667 C26.2@18.439,17.667 21.168,17.667 U2.2@21.461,17.374 ; R20.1@54.127,24.46 56.341,24.46 Q1.1@57.016,25.136 58.276,23.876 v1(58.928,23.876) ; R1.2@64.77,50.887 v1(64.77,52.578) ; Designator141.24@69.367,27.813 Designator141.25@71.907,25.273 ; Designator178.1@72.39,7.112 Designator178.2@72.39,9.652 ; v1(83.82,55.118) 86.424,52.514 C44.2@86.424,52.402 ; v1(86.868,24.13) 87.538,23.46 88.793,23.46 89.144,23.109 89.144,21.854 R10.1@89.941,21.057 ; R11.1@89.941,19.126 R10.1@89.941,20.93 R10.1@89.941,21.057 ; R3.2@91.594,52.261 92.215,52.261 v1(92.558,52.603) ; U6.3@95.125,15.189 95.125,18.518 95.834,19.228 ; v1(98.044,20.32) 98.806,19.558 C41.1@98.806,19.228 95.834,19.228 ; R6.1@117.78,45.364 119.05,45.364 Designator43.1@120.752,47.066 ; v1(128.524,34.798) 130.429,32.893 P2.7@137.16,32.893 ; v1(180.34,20.574) 181.342,21.576 R27.2@181.547,21.576 ; R28.2@181.547,19.458 R27.2@181.547,21.576 ; R22.2@181.547,30.05 R24.2@181.547,27.931 R25.2@181.547,25.813 ; J1.4@189.493,25.791 188.34,24.638 182.722,24.638 R25.2@181.547,25.813 ; R10.1@89.941,21.057 89.941,21.361 90.627,22.047 U6.8@92.583,22.047 U6.7@93.853,22.047 93.853,21.209 95.834,19.228 ; R27.2@181.547,21.576 C42.2@181.547,23.695 R25.2@181.547,25.813
  Top Layer w0.508: U2.2@21.461,17.374 U2.4@27.557,17.374 35.025,9.906 Designator137.2@41.656,9.906 51.562,9.906 55.118,13.462 55.118,23.47 R20.1@54.127,24.46
  Top Layer w0.635: D6.2@26.67,23.953 26.67,18.261 U2.4@27.557,17.374
  VCC w0.3: v1(58.928,23.876) 70.51,23.876 71.907,25.273 73.05,24.13 ; v1(64.77,52.578) 66.808,54.616 72.84,54.616 73.342,55.118 v1(83.82,55.118) ; Designator141.24@69.342,27.838 Designator141.24@69.367,27.813 ; Designator178.2@72.39,9.652 75.184,12.446 75.184,20.828 73.05,22.962 73.05,24.13 ; v1(86.868,24.13) 73.05,24.13 ; v1(98.044,20.32) 110.998,7.366 122.936,7.366 126.492,10.922 v1(126.492,14.478) 126.492,29.542 122.504,33.53 ; Designator43.1@120.752,47.066 122.504,45.314 122.504,33.53 ; v1(128.524,34.798) 127.256,33.53 122.504,33.53
  GND w0.3: v1(83.82,55.118) v1(91.694,55.118) 93.218,55.118 108.966,39.37 v1(109.474,39.37)
  Bottom Layer w0.3: v1(91.694,55.118) 91.694,53.467 v1(92.558,52.603) ; v1(109.474,39.37) 111.506,41.402 115.087,41.402 Designator43.1@120.752,47.066 ; v1(126.492,14.478) 175.514,14.478 180.34,19.304 v1(180.34,20.574) ; P3_1.2@137.16,28.829 P2.7@137.16,32.893
VCC3.3M: C11.1 C12.1 C13.1 C14.1 C15.1 C16.1 C17.1 C18.1 C19.1 C20.1 C21.1 D1.1 pad.15 pad.38 pad.41 R10.2 R11.2 U1.17 U1.39 U1.52 U1.62 U1.72 U1.84 U1.95 U1.108 U1.121 U1.131 U1.144 | length 128.4
  Top Layer w0.254: C16.1@87.249,16.916 C15.1@88.9,16.916 ; v1(88.544,22.86) 88.544,20.944 R10.2@88.557,20.931 R11.2@88.557,19.128 88.9,18.785 C15.1@88.9,16.916 ; v1(90.145,33.503) 90.336,33.312 U1.62@91.823,33.312 ; v1(90.17,28.981) 90.17,28.975 90.787,28.358 91.777,28.358 U1.72@91.823,28.312 98.312,28.312 99.823,26.801 U1.84@99.823,25.812 99.823,24.822 100.889,23.756 104.257,23.756 ; C17.1@90.678,16.916 C15.1@88.9,16.916 ; U1.52@91.823,38.312 90.102,38.312 pad.38@90.068,38.278 89.278,38.278 84.328,43.228 C18.1@84.328,43.942 C11.1@85.598,43.942 C12.1@88.138,43.942 89.383,43.942 C20.1@89.408,43.917 90.303,44.812 U1.39@91.823,44.812 ; pad.15@103.823,45.834 U1.17@103.823,48.312 ; v1@105.276,23.756 104.257,23.756 ; U1.95@105.323,25.812 105.323,24.822 104.257,23.756 ; U1.108@111.823,25.812 pad.41@112.491,25.812 ; v1(112.471,34.315) 112.471,37.284 111.64,38.115 111.64,38.593 112.313,39.266 ; v1@112.475,34.312 U1.121@114.323,34.312 ; U1.131@114.323,39.312 114.277,39.266 112.313,39.266 ; U1.144@114.323,45.812 112.842,45.812 v1(112.344,45.314) 112.344,39.297 112.313,39.266 ; C14.1@114.91,57.836 C19.1@114.91,56.388 C13.1@114.91,54.839 v1(114.91,53.188) 115.011,53.289 D1.1@116.688,53.289
  VCC w0.254: v1(88.544,22.86) 88.544,23.828 90.17,25.454 v1(90.17,28.981) 90.17,33.477 v1(90.145,33.503) pad.38@90.145,38.202 ; pad.15@103.835,45.822 104.343,45.314 v1(112.344,45.314) 114.91,47.879 v1(114.91,53.188) ; v1(105.283,23.749) 110.439,23.749 pad.41@112.497,25.806 112.497,32.56 113.048,33.111 113.048,33.738 v1(112.471,34.315)
VCC5: 2.20 3.20 4.20 5.20 6.20 7.20 8.20 9.20 10.20 11.20 12.20 13.20 14.20 15.20 16.20 C2.2 C27.2 C32.1 C34.2 C40.2 C43.1 D5.2 Designator138.2 Designator141.28 F1.1 U2.3 U4.3 U5.16 | length 399.7
  Top Layer w0.3: C40.2@43.878,17.27 C34.2@43.878,15.746 45.415,15.746 U4.3@46.684,14.478 ; C32.1@60.681,30.48 61.595,30.48 ; U5.16@61.747,33.036 61.747,30.632 61.595,30.48 ; C43.1@62.357,30.48 61.595,30.48 ; C43.1@62.382,30.505 63.932,28.956 v1(64.77,28.956)
  Top Layer w0.5: v1(6.934,78.283) 7.01,78.207 2.20@7.01,76.203 ; 8.20@21.11,76.101 v1@21.11,78.254 ; v1(35.077,78.283) 35.142,78.218 11.20@35.142,76.101 ; 3.20@49.174,76.101 v1@49.174,78.233 ; v1@50.863,59.474 C2.2@50.863,58.495 C27.2@50.863,56.844 54.993,56.844 D5.2@57.48,54.356 v1@60.96,50.876 ; 6.20@63.206,76.101 v1@63.206,78.242 ; 12.20@77.14,76.203 v1@77.14,78.257 ; v1(91.262,78.257) 91.269,78.251 15.20@91.269,76.101 ; 10.20@105.301,76.101 v1@105.301,78.24 ; 16.20@119.332,76.101 v1@119.332,78.229 ; 5.20@133.364,76.101 v1@133.364,78.218 ; 14.20@147.396,76.101 v1@147.396,78.258 ; 7.20@161.427,76.101 v1@161.427,78.242 ; 9.20@175.459,76.101 175.459,78.253 v1(175.489,78.283) ; 4.20@189.491,76.101 v1@189.491,78.225 ; 13.20@203.53,76.126 v1@203.53,78.257
  Top Layer w0.635: U2.3@21.461,14.834 26.135,10.16 Designator138.2@28.956,10.16 ; v1(42.926,13.208) 43.878,14.16 C34.2@43.878,15.746
  Top Layer w1: v1(15.24,60.706) F1.1@22.522,60.706
  VCC w0.3: v1(60.96,50.8) 64.77,46.99 v1(64.77,28.956)
  VCC w0.5: v1(42.926,13.208) 59.842,13.208 ; v1(49.124,78.283) 49.124,65.862 51.13,63.855 51.13,59.741 v1(50.876,59.487) ; 59.944,13.208 Designator141.28@69.469,22.733
  VCC w0.635: Designator138.2@28.956,10.16 32.004,13.208 v1(42.926,13.208)
  VCC w1: v1(15.24,60.706) 8.298,60.706 4.488,64.516 4.488,75.837 v1(6.934,78.283) v1(21.082,78.283) v1(35.077,78.283) v1(49.124,78.283) v1(63.246,78.283) v1(77.114,78.283) v1(119.278,78.283) v1(147.371,78.283) v1(175.489,78.283) v1(203.505,78.283)
  GND w0.3: v1(64.77,28.956) 64.77,28.448 69.367,23.851 Designator141.28@69.367,22.733
  other v1: 105.283,78.257 133.325,78.257 161.442,78.257 189.459,78.257
VDDA: C9.2 C10.2 R3.1 U1.32 U1.33 | length 8.5
  Top Layer w0.3: C10.2@90.183,52.286 R3.1@91.592,50.876 C9.2@93.61,50.876 ; C9.2@93.612,50.878 94.502,49.987 95.504,49.987 95.8,49.691 U1.33@95.8,48.335 ; U1.33@95.823,48.312 U1.32@96.3,48.312
VDDAMP: 
VUSB: C28.1 C29.2 K1.3 L1.1 R16.1 USB_1.1 USB_2.1 | length 254.9
  Top Layer w0.5: USB_2.1@8.782,17.348 8.646,17.348 4.628,21.366 4.628,21.441 4.572,21.497 4.572,31.75 7.188,34.366 USB_1.1@8.528,34.366 12.522,34.366 20.574,42.418 20.574,47.716 18.999,49.291 R16.1@18.999,50.978 19.083,51.062 33.637,51.062 L1.1@34.468,51.892 L1.1@37.668,51.892 ; C29.2@42.989,60.073 42.989,57.213 C28.1@40.97,55.194 L1.1@37.668,51.892 ; v1(48.082,52.934) 47.041,51.892 L1.1@37.668,51.892
  VCC w0.5: v1(108.102,58.674) 109.644,58.674 v1(114.724,63.754) ; v1(179.24,58.674) 181.526,56.388 207.315,56.388 K1.3@208.737,54.966
  GND w0.5: v1(66.802,56.439) 66.802,56.464 67.375,57.037 106.466,57.037 v1(108.102,58.674) ; v1(114.724,63.754) 174.16,63.754 v1(179.24,58.674)
  Bottom Layer w0.5: v1(48.082,52.934) 48.489,53.34 63.703,53.34 v1(66.802,56.439)
W1: 1.18 B1.1 | length 24.4
  Top Layer w0.254: v1(8.28,87.02) 1.18@8.28,90.475 ; v1(21.082,94.996) 22.294,94.996 B1.1@24.859,97.561
  Bottom Layer w0.254: v1(8.28,87.02) 13.106,87.02 v1(21.082,94.996)
W2: 1.17 M1.1 | length 95.5
  Top Layer w0.254: v1(9.55,88.849) 1.17@9.55,90.475
  Bottom Layer w0.254: v1(9.55,88.849) 11.041,88.849 19.05,96.858 19.05,98.298 24.638,103.886 87.324,103.886 90.02,101.19 90.918,101.19 91.556,100.552 91.556,99.012 90.467,97.923 M1.1@90.467,97.561
W3: 1.16 T1.1 | length 163.4
  Top Layer w0.254: v1(10.82,87.884) 1.16@10.82,90.475 ; v1(25.316,104.902) 26.867,106.453 ; 26.799,106.453 26.867,106.453 ; v1@68.342,106.453 26.867,106.453 ; v1(87.546,99.568) 88.464,98.65 95.674,98.65 96.636,99.612 96.636,101.546 v1(96.944,101.854)
  VCC w0.254: v1(68.242,106.426) 71.29,106.426 78.148,99.568 v1(87.546,99.568) ; v1(96.944,101.854) 104.818,101.854 105.072,101.6 105.098,101.625 150.792,101.625 T1.1@154.856,97.561
  GND w0.254: v1(10.82,87.884) 25.316,102.38 v1(25.316,104.902)
W4: 1.15 T1.21 | length 152.9
  Top Layer w0.254: 1.15@12.09,90.475 12.09,88.24 v1(12.192,88.138)
  VCC w0.254: v1(84.35,101.19) 84.945,101.785 91.879,101.785 92.71,102.616 152.341,102.616 T1.21@154.856,100.101
  Bottom Layer w0.254: v1(12.192,88.138) 12.192,88.984 24.808,101.6 83.94,101.6 v1(84.35,101.19)
W5: 1.14 M1.21 | length 83.8
  Top Layer w0.254: 1.14@13.36,90.475 13.999,91.113 13.999,91.448 23.622,101.071 v1(23.622,101.854)
  Bottom Layer w0.254: v1(23.622,101.854) 23.622,102.108 23.876,102.362 67.256,102.362 67.3,102.318 67.778,102.318 67.821,102.362 84.498,102.362 86.53,100.33 90.238,100.33 M1.21@90.467,100.101
W6: 1.13 B1.21 | length 18.1
  Top Layer w0.2: 1.13@14.63,90.475 14.63,90.83 17.158,93.358 22.543,93.358 26.162,96.977 26.162,98.552 24.859,99.855 B1.21@24.859,100.101
W7: 1.12 B1.2 | length 15.4
  Top Layer w0.254: 1.12@15.9,90.475 15.9,91.084 17.526,92.71 23.622,92.71 27.399,96.487 B1.2@27.399,97.561
W8: 1.11 M1.2 | length 81.5
  Top Layer w0.254: v1@17.17,88.671 1.11@17.17,90.475
  Bottom Layer w0.254: v1(17.069,88.57) 24.968,96.469 91.915,96.469 M1.2@93.007,97.561
W9: 10.18@134.595,90.424 T1.2 | length 26
  Top Layer w0.254: 10.18@134.595,90.424 135.233,91.062 135.233,91.397 140.203,96.368 156.202,96.368 T1.2@157.396,97.561
W10: 10.17@135.865,90.424 T1.22 | length 29
  Top Layer w0.254: 10.17@135.865,90.424 136.503,91.062 136.503,91.397 141.019,95.914 157.288,95.914 158.485,97.11 158.485,99.012 T1.22@157.396,100.101
W11: 10.16@137.135,90.424 M1.22 | length 50.7
  Top Layer w0.254: 10.16@137.135,90.424 137.135,91.034 v1(137.77,91.669)
  VCC w0.254: M1.22@93.007,100.101 93.007,99.739 94.096,98.65 94.096,97.472 95.604,95.964 104.48,95.964 106.288,94.156 123.975,94.156 125.93,92.201 137.238,92.201 v1(137.77,91.669)
W12: 10.15@138.405,90.424 B1.22 | length 119.4
  Top Layer w0.254: 10.15@138.405,90.424 138.405,91.084 v1(139.04,91.719)
  GND w0.254: B1.22@27.399,100.101 28.399,100.101 30.083,101.785 92.387,101.785 93.258,102.656 106.701,102.656 106.843,102.514 122.614,102.514 124.938,100.19 124.938,99.65 125.576,99.012 131.196,99.012 132.558,97.65 132.558,97.11 133.196,96.472 134.287,96.472 v1(139.04,91.719)
W13: 10.14@139.675,90.424 B1.3 | length 120.4
  Top Layer w0.254: v1(139.065,89.205) 139.065,89.814 10.14@139.675,90.424
  GND w0.254: B1.3@29.939,97.561 31.39,99.012 31.39,100.552 32.028,101.19 81.537,101.19 82.753,99.974 84.988,99.974 86.204,101.19 103.832,101.19 104.844,102.202 106.513,102.202 107.525,101.19 121.398,101.19 122.398,100.19 122.398,99.65 123.398,98.65 123.938,98.65 124.938,97.65 124.938,97.11 125.576,96.472 125.727,96.472 132.994,89.205 v1(139.065,89.205)
W14: 10.13@140.945,90.424 M1.3 | length 50
  Top Layer w0.254: 10.13@140.945,90.424 140.945,91.084 v1(141.58,91.719)
  VCC w0.254: M1.3@95.547,97.561 96.69,96.418 104.668,96.418 106.476,94.61 124.163,94.61 126.118,92.655 140.644,92.655 v1(141.58,91.719)
W15: 10.12@142.215,90.424 T1.3 | length 20.9
  Top Layer w0.254: 10.12@142.215,90.424 142.853,91.062 142.853,91.397 146.915,95.46 157.477,95.46 159.578,97.561 T1.3@159.936,97.561
W16: 10.11@143.485,90.424 T1.23 | length 23.9
  Top Layer w0.254: 10.11@143.485,90.424 143.678,90.617 143.678,90.952 147.731,95.006 158.92,95.006 161.025,97.11 161.025,98.012 159.936,99.101 T1.23@159.936,100.101
W17: 2.18@22.352,90.449 M1.23 | length 79
  Top Layer w0.254: 2.18@22.352,90.449 22.352,92.024 v1(22.377,92.05)
  Bottom Layer w0.254: v1(22.377,92.05) 26.317,95.99 92.975,95.99 94.096,97.11 94.096,98.65 M1.23@95.547,100.101
W18: 2.17@23.622,90.449 B1.23 | length 12.3
  Top Layer w0.254: 2.17@23.622,90.449 24.26,91.088 24.26,91.792 28.85,96.382 28.85,98.65 29.939,99.739 B1.23@29.939,100.101
W19: 2.16@24.892,90.449 B1.4 | length 11.3
  Top Layer w0.254: 2.16@24.892,90.449 25.53,91.088 25.53,92.408 29.594,96.472 30.39,96.472 31.479,97.561 B1.4@32.479,97.561
W20: 2.15@26.162,90.449 M1.4 | length 75.9
  Top Layer w0.254: 2.15@26.162,90.449 v1(26.162,92.202)
  Bottom Layer w0.254: v1(26.162,92.202) 29.286,95.326 63.229,95.326 63.438,95.536 95.061,95.536 97.087,97.561 M1.4@98.087,97.561
W21: 2.14@27.432,90.449 T1.4 | length 146.1
  Top Layer w0.254: v1(27.421,85.192) 27.432,85.203 2.14@27.432,90.449
  GND w0.254: v1(27.421,85.192) 27.82,84.792 30.393,84.792 31.242,85.642 40.422,85.642 40.875,85.188 150.103,85.188 T1.4@162.476,97.561
W22: 2.13@28.702,90.449 T1.24 | length 145.8
  Top Layer w0.254: v1(28.55,85.75) 28.55,90.297 2.13@28.702,90.449
  GND w0.254: v1(28.55,85.75) 30.709,85.75 31.054,86.096 40.617,86.096 40.98,85.732 148.107,85.732 158.847,96.472 160.387,96.472 161.025,97.11 161.025,98.65 T1.24@162.476,100.101
W23: 2.12@29.972,90.449 M1.24 | length 74.7
  Top Layer w0.254: 2.12@29.972,90.449 v1(29.972,92.939)
  VCC w0.254: v1(29.972,92.939) 29.972,93.514 33.568,97.11 33.568,98.389 v1(33.858,98.679)
  GND w0.254: v1(84.328,98.748) 96.734,98.748 M1.24@98.087,100.101
  Bottom Layer w0.254: v1(33.858,98.679) 33.927,98.748 v1(84.328,98.748)
W24: 2.11@31.242,90.449 B1.24 | length 11.1
  Top Layer w0.254: 2.11@31.242,90.449 31.242,90.784 33.568,93.11 33.568,98.012 32.479,99.101 B1.24@32.479,100.101
W25: 3.18@36.398,90.348 B1.5 | length 7.8
  Top Layer w0.254: B1.5@35.019,97.561 35.019,91.727 3.18@36.398,90.348
W26: 3.17@37.668,90.348 M1.5 | length 66.9
  Top Layer w0.254: 3.17@37.668,90.348 37.668,92.024 v1(37.694,92.05)
  Bottom Layer w0.254: v1(37.694,92.05) 40.386,94.742 63.287,94.742 63.627,95.082 97.147,95.082 99.627,97.561 M1.5@100.627,97.561
W27: 3.16@38.938,90.348 T1.5 | length 137.8
  Top Layer w0.254: v1(38.938,84.176) 3.16@38.938,90.348
  GND w0.254: v1(38.938,84.176) 38.964,84.15 151.605,84.15 T1.5@165.016,97.561
W28: 3.15@40.208,90.348 T1.25 | length 137.5
  Top Layer w0.254: v1(40.183,85.065) 40.208,85.09 3.15@40.208,90.348
  GND w0.254: v1(40.183,85.065) 40.513,84.734 151.189,84.734 163.565,97.11 163.565,98.65 T1.25@165.016,100.101